# Altium PCB USB2USB.PcbDoc
Units mm, origin at the board's own origin, x right, y up, seen from the top; angles counter-clockwise.
Board outline 26.92 x 15.62 mm, 4 copper layers (Top Layer, Plane (GND), Layer 2, Bottom Layer), stack 0.603 mm thick; 4 components, 6 nets, 32 pads, 5 vias.
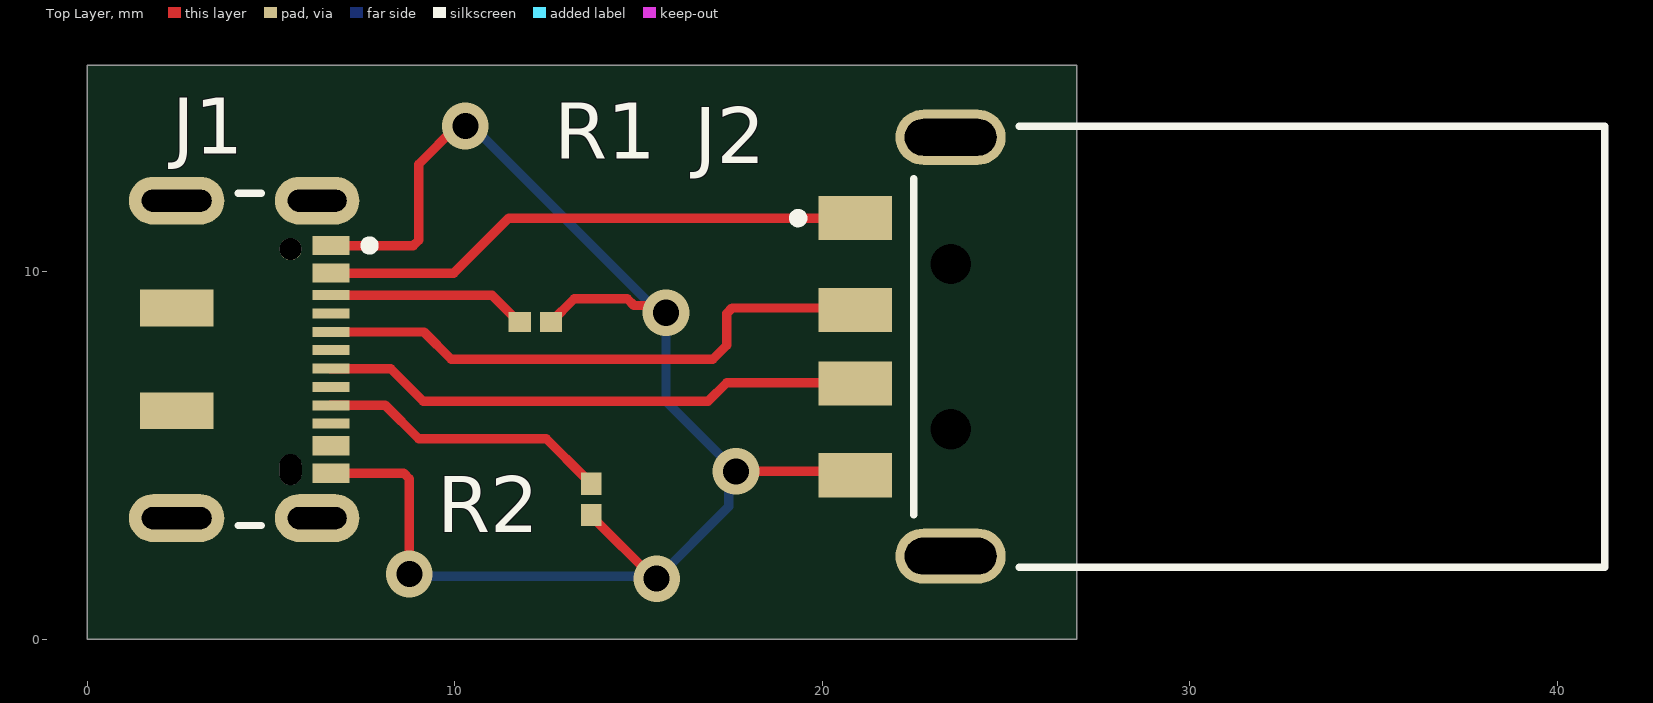
[diagram p0: Top Layer view]
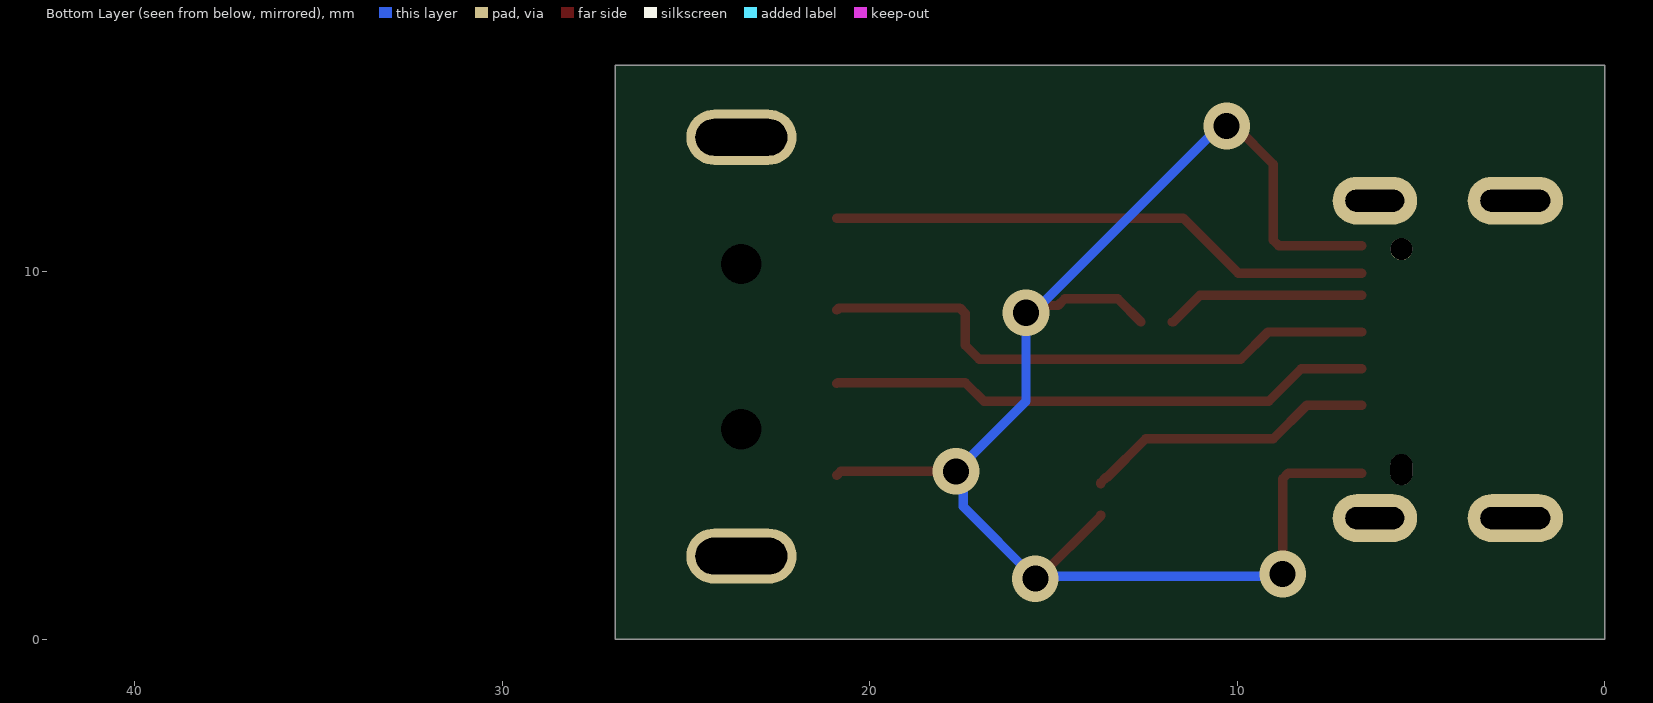
[diagram p1: Bottom Layer view, seen from below]
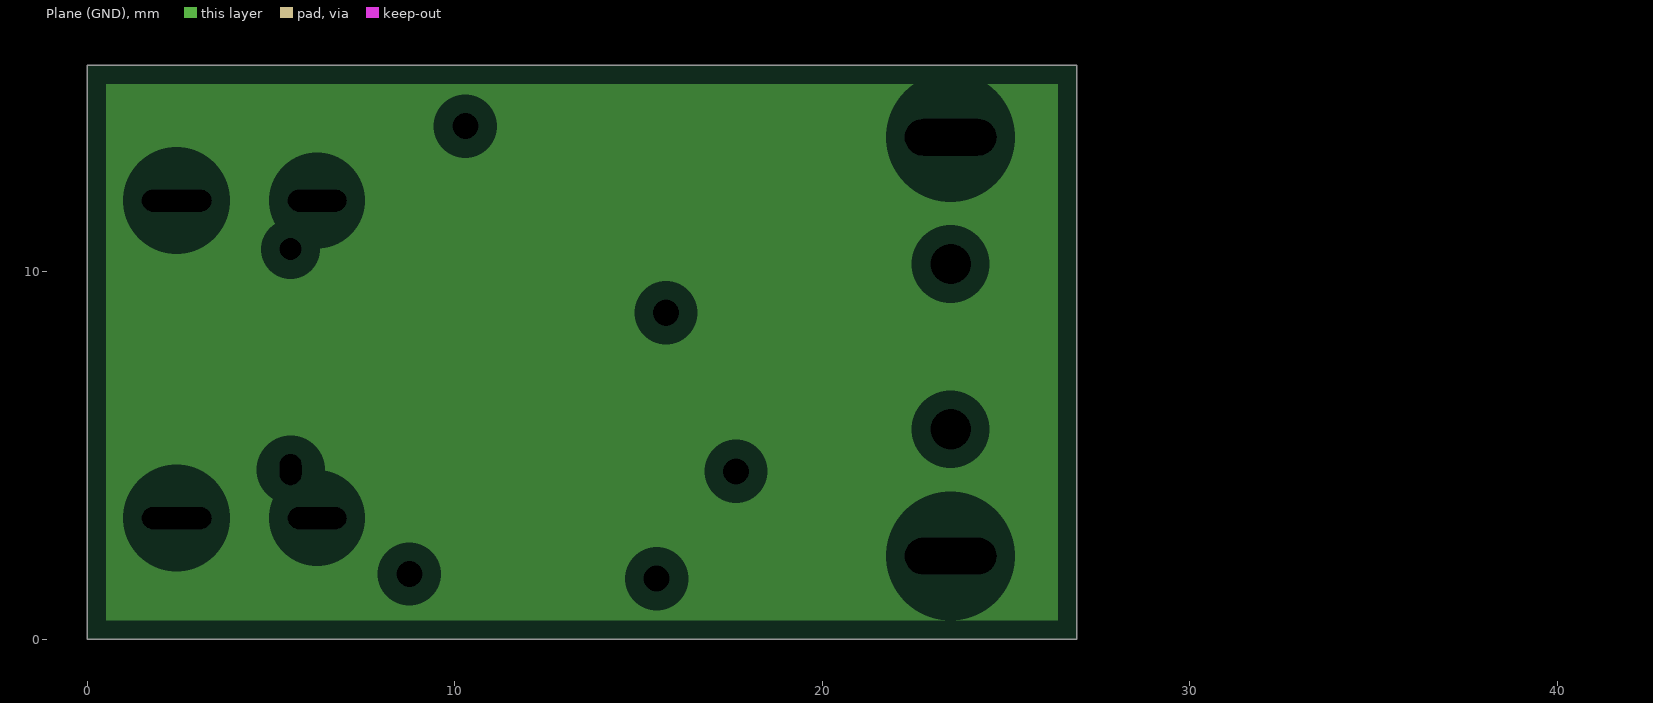
[diagram p2: Plane (GND), clearances drawn from the general rule]
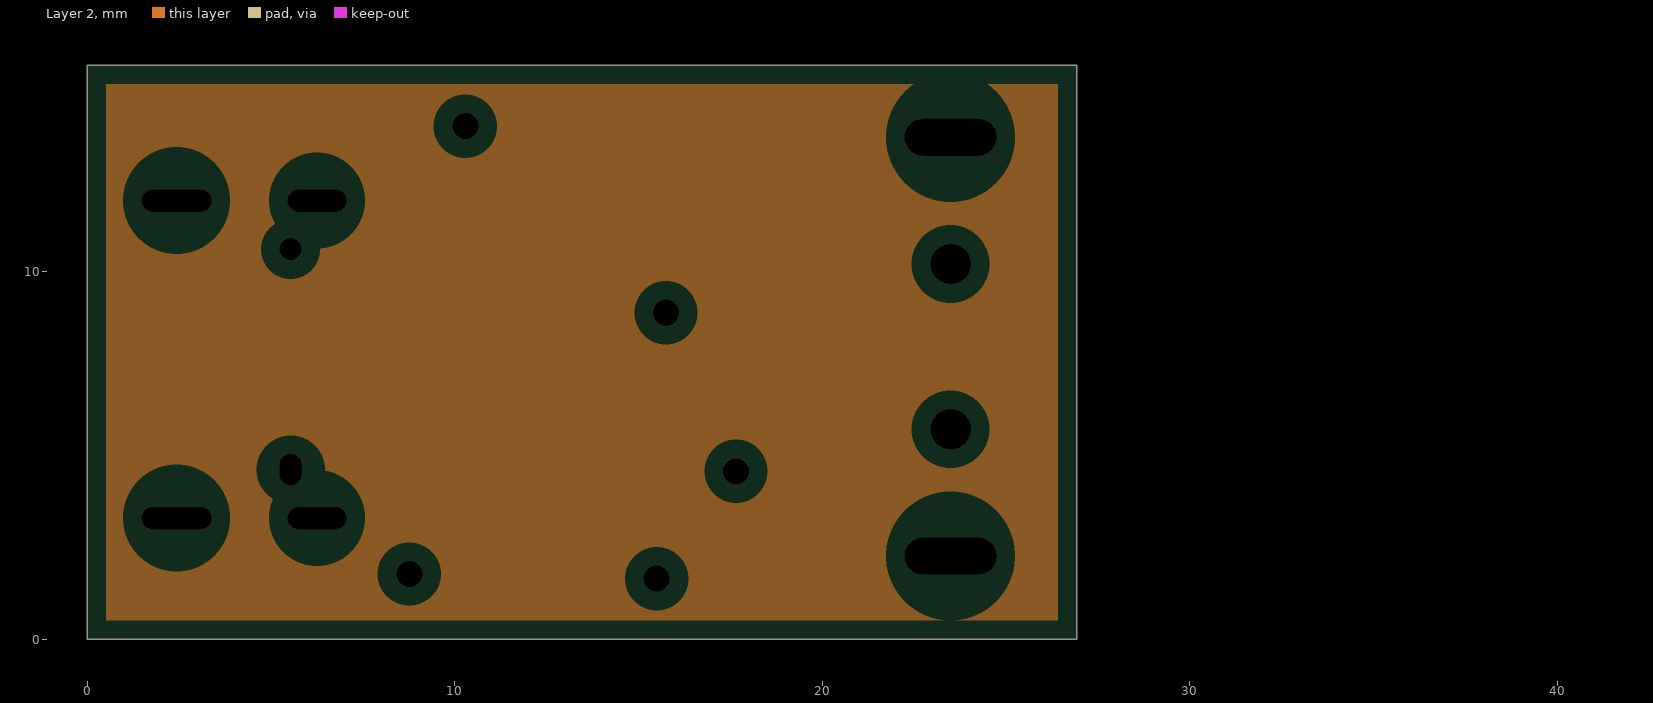
[diagram p3: Layer 2, clearances drawn from the general rule]

## Layer stack, top to bottom
Top Solder: solder mask 0.0102, Solder Resist, Dk 3.5
Top Layer: signal copper 0.0356
Dielectric 2: prepreg 0.0711, PP-006, Dk 4.1
Plane (GND): plane copper 0.035, net GND
Dielectric 1: dielectric 0.32, FR-4, Dk 4.8
Layer 2: plane copper 0.035
Dielectric 3: prepreg 0.0711, PP-006, Dk 4.1
Bottom Layer: signal copper 0.0356
Bottom Solder: solder mask 0.0102, Solder Resist, Dk 3.5

## Board outline
0,0 26.924,0 26.924,15.621 0,15.621

## Design rules (kind name [scope] priority, off if disabled: settings)
Clearance Clearance_1 [All] p1: gap=0.2 ignorepadtopadclearanceinfootprint=FALSE
ComponentClearance [All] p1: gap=0.2 collisioncheckmode=3 verticalgap=0.2 showdistances=FALSE
DiffPairsRouting [All] p1: maxlimit=0.254 minlimit=0.2 mostfreqgap=0.2 toplayer_minwidth=0.381 toplayer_maxwidth=0.381 toplayer_prefwidth=0.381 bottomlayer_minwidth=0.381 bottomlayer_maxwidth=0.381 bottomlayer_prefwidth=0.381 maxuncoupledlength=12.7
MinimumSolderMaskSliver [All] p1: minsoldermaskwidth=0.2
PlaneClearance [All] p1: clearance=0.508
PlaneConnect [All] p1: planeconnectstyle=Relief reliefexpansion=0.508 reliefentries=4 reliefconductorwidth=0.254 reliefairgap=0.254
PolygonConnect [All] p1: connectstyle=Relief reliefconductorwidth=0.254 reliefentries=4 polygonreliefangle="90 Angle" airgapwidth=0.254
RoutingVias [All] p1: holewidth=0.711 width=1.27 viastyle="Through Hole" minholewidth=0.711 minwidth=1.27 maxholewidth=0.711 maxwidth=1.27
SolderMaskExpansion [All] p1: expansion=0.102 istentingtop=FALSE
SupplyNets "Schematic Supply Nets" [InNet('GND')] p1: voltage=0.000
Width [All] p1: maxlimit=0.254 minlimit=0.2 preferedwidth=0.254
25 further rules are at their usual default settings.

## Components (designator, comment, footprint, x,y, rotation, side; value= is the part's Value field where it differs from the comment)
J1 "DX07S016JA1R1500" FP-DX07S016JA1R1500-MFG 3.429,7.62 r270 top
J2 "480-37-1000" MOLX-480-37-1000_V 22.195,7.965 r90 top
R1 "RC0402FR-075K1L" RESC1005X40X25NL05T10 12.192,8.636 r0 top
R2 "RC0402FR-075K1L" RESC1005X40X25NL05T10 13.716,3.81 r270 top

## Footprints (in the part's own frame and the unit in brackets; to place one, negate y for a bottom-side part, rotate by r counter-clockwise, add the part's x,y. Pads: shape width x height; smd on the part's side, far side on the other; paste and mask are expansions set on the pad)
FP-DX07S016JA1R1500-MFG [mm]
  rrect100% 1.3x2.3 hole 1.6 slot 0.6 at 0 deg paste-2539.97 mask+0: 1(-4.32,2.825) 2(4.32,2.825)
  rrect100% 1.3x2.6 hole 1.9 slot 0.6 at 0 deg paste-2539.97 mask+0: 3(-4.32,-1) 6(4.32,-1)
  rect 1x2 smd paste+0 mask+0: 4(-1.4,-1) 5(1.4,-1)
  rect 0.52x1 smd paste+0 mask+0: A1/B12(-3.1,3.2) A4/B9(-2.35,3.2) A12/B1(3.1,3.2) B4/A9(2.35,3.2)
  rect 0.27x1 smd paste+0 mask+0: A5(-1.75,3.2) A6(-0.25,3.2) A7(0.75,3.2) A8(1.75,3.2) B5(1.25,3.2) B6(0.25,3.2) B7(-0.75,3.2) B8(-1.25,3.2)
  round 0.6 hole 0.6 unplated paste-2539.97 mask+0: ""(-3,2.1)
  rrect100% 0.85x0.6 hole 0.6 slot 0.85 at 0 deg unplated paste-2539.97 mask+0: ""(3,2.1)
  silkscreen extent -4.52,0.67 4.52,4.38, body extent -5.07,-3.75 5.07,4.08, height 0.25
MOLX-480-37-1000_V [mm] "CONN, 4-Leads, Body 12x18.8mm"
  rect 1.2x2 smd: 1(3.5,1.3) 2(1,1.3) 3(-1,1.3) 4(-3.5,1.3)
  oval 1.5x3 hole 1 slot 2.5 at 90 deg: 5(-5.7,-1.3) 6(5.7,-1.3)
  round 0.5 hole 1.1 unplated: MH1(-2.25,-1.3) MH2(2.25,-1.3)
  silkscreen extent -6,-19.1 6,2.97, body extent -6.35,-19.08 6.35,2.2, height 3.07
RESC1005X40X25NL05T10 [mm] "Chip Resistor, 2-Leads, Body 1.00x0.50mm, IPC Medium Density"
  rect 0.6x0.55 smd: 1(-0.425,0) 2(0.425,0)
  body extent -0.53,-0.27 0.53,0.28, height 0.4

## Part data
J1: library part CMP-19038-000003-1, "CONN RCP USB2.0 TYP C 24P SMD RA"
J2: library part CMP-1676-00005-2, "Universal Serial Bus (USB) Shielded I/O Plug, Type A, Right Angle Connector, 1.5 A, -20 to 85 degC, 4-Pin SMD, RoHS, Tray", Case Code (Imperial)=0603, Case Code (Metric)=1608, Max Operating Temperature="155 degC", Min Operating Temperature="-55 degC", Package Quantity=5000, Power Rating="100 mW", Resistance="1 mohm", Tolerance=1%, Voltage Rating="50 V", Case\Package=0603, ComponentLink1Description="Manufacturer URL", ComponentLink1URL=http://www.molex.com/, ComponentLink2Description=Datasheet, ComponentLink2URL=http://www.molex.com/pdm_docs/sd/480371000_sd.pdf, DatasheetVersion="Rev. D, 06/2004", Height="0.45 mm", Length="1.6 mm", Mount="Surface Mount", PackageDescription="4-Pin Surface Mount Device, Body 12 x 18.8 mm", PackageReference=480-37-1000, Packaging="Tape and Reel", Pins=2, REACH SVHC="No SVHC", RoHSCompliant=true, Voltage Rating (DC)="50 V", Width="0.8 mm"
R1 R2: library part CMP-2002-07753-1, Manufacturer="Yageo / Phycomp", Part Number=RC0402FR-075K1L

## Via types
v1: diameter 1.27, hole 0.711, Top Layer to Bottom Layer, 5 vias

## Nets (pads, with @x,y where several pads share a name; then routed paths per layer and width w, separated by ;. In a path a pad name is that pad's centre, name@x,y a point inside that pad or via, vN(x,y) a via of type N, cw(c..) or ccw(c..) an arc to the next point about the centre after c; other vN are vias at no path point)
GND: J1.A1/B12 J1.A12/B1 J2.4 R1.2 R2.2 | length 43.7
  Top Layer w0.254: J1.A12/B1@6.613,4.517 8.614,4.517 8.763,4.368 v1(8.763,1.778) ; J1.A1/B12@6.613,10.717 8.868,10.717 9.017,10.866 9.017,12.932 10.055,13.97 v1(10.287,13.97) ; R1.2 13.252,9.271 14.692,9.271 14.879,9.084 15.554,9.084 v1(15.748,8.89) ; R2.2 13.716,3.36 15.425,1.651 v1(15.494,1.651) ; v1(17.653,4.572) 20.788,4.572 J2.4
  Bottom Layer w0.254: v1(8.763,1.778) 8.826,1.714 15.43,1.714 v1(15.494,1.651) 17.459,3.616 17.459,4.378 v1(17.653,4.572) 15.748,6.477 v1(15.748,8.89) 15.557,8.89 10.477,13.97 v1(10.287,13.97)
NetJ1_A4/B9: J1.A4/B9 J2.1 | length 14.9
  Top Layer w0.254: J1.A4/B9@6.613,9.967 9.967,9.967 11.465,11.465 J2.1
NetJ1_A5: J1.A5 R1.1 | length 5.5
  Top Layer w0.254: J1.A5@6.613,9.367 11.011,9.367 11.742,8.636 R1.1
NetJ1_B5: J1.B5 R2.1 | length 8
  Top Layer w0.254: J1.B5@6.613,6.367 8.111,6.367 9.017,5.461 12.49,5.461 13.543,4.408 13.568,4.408 13.716,4.26 R2.1
NetJ1_B6: J1.B6 J2.3 | length 14.9
  Top Layer w0.254: J1.B6@6.613,7.367 8.254,7.367 9.144,6.477 16.891,6.477 17.399,6.985 20.875,6.985 J2.3
NetJ1_B7: J1.B7 J2.2 | length 15.7
  Top Layer w0.254: J1.B7@6.613,8.367 9.159,8.367 9.906,7.62 17.018,7.62 17.399,8.001 17.399,8.868 17.548,9.017 20.843,9.017 J2.2
pads on no net: J1. J1.1 J1.2 J1.3 J1.4 J1.5 J1.6 J1.A6 J1.A7 J1.A8 J1.B4/A9 J1.B8 J2.5 J2.6 J2.MH1 J2.MH2

## Polygon pours and split planes (outlines as drawn)
no net on Layer 2 (split plane): 26.414,0.51 0.51,0.51 0.51,15.111 26.414,15.111
no net on Plane (GND) (split plane): 26.414,0.51 0.51,0.51 0.51,15.111 26.414,15.111

## Text inside footprints (layer, text, board x,y; h text height)
J2: Mechanical 1 "PCB EDGE" at 26.035,9.235 h0.5 r90